# Altium PCB Altium_XIAO-BOT-Control-Board.pcbdoc
Units mil, origin at the board's own origin, x right, y up, seen from the top; angles counter-clockwise.
Board outline 2024.18 x 3035.1 mil, 2 copper layers (Top Layer, Bottom Layer); 11 components, 31 nets, 74 pads, 1 vias.
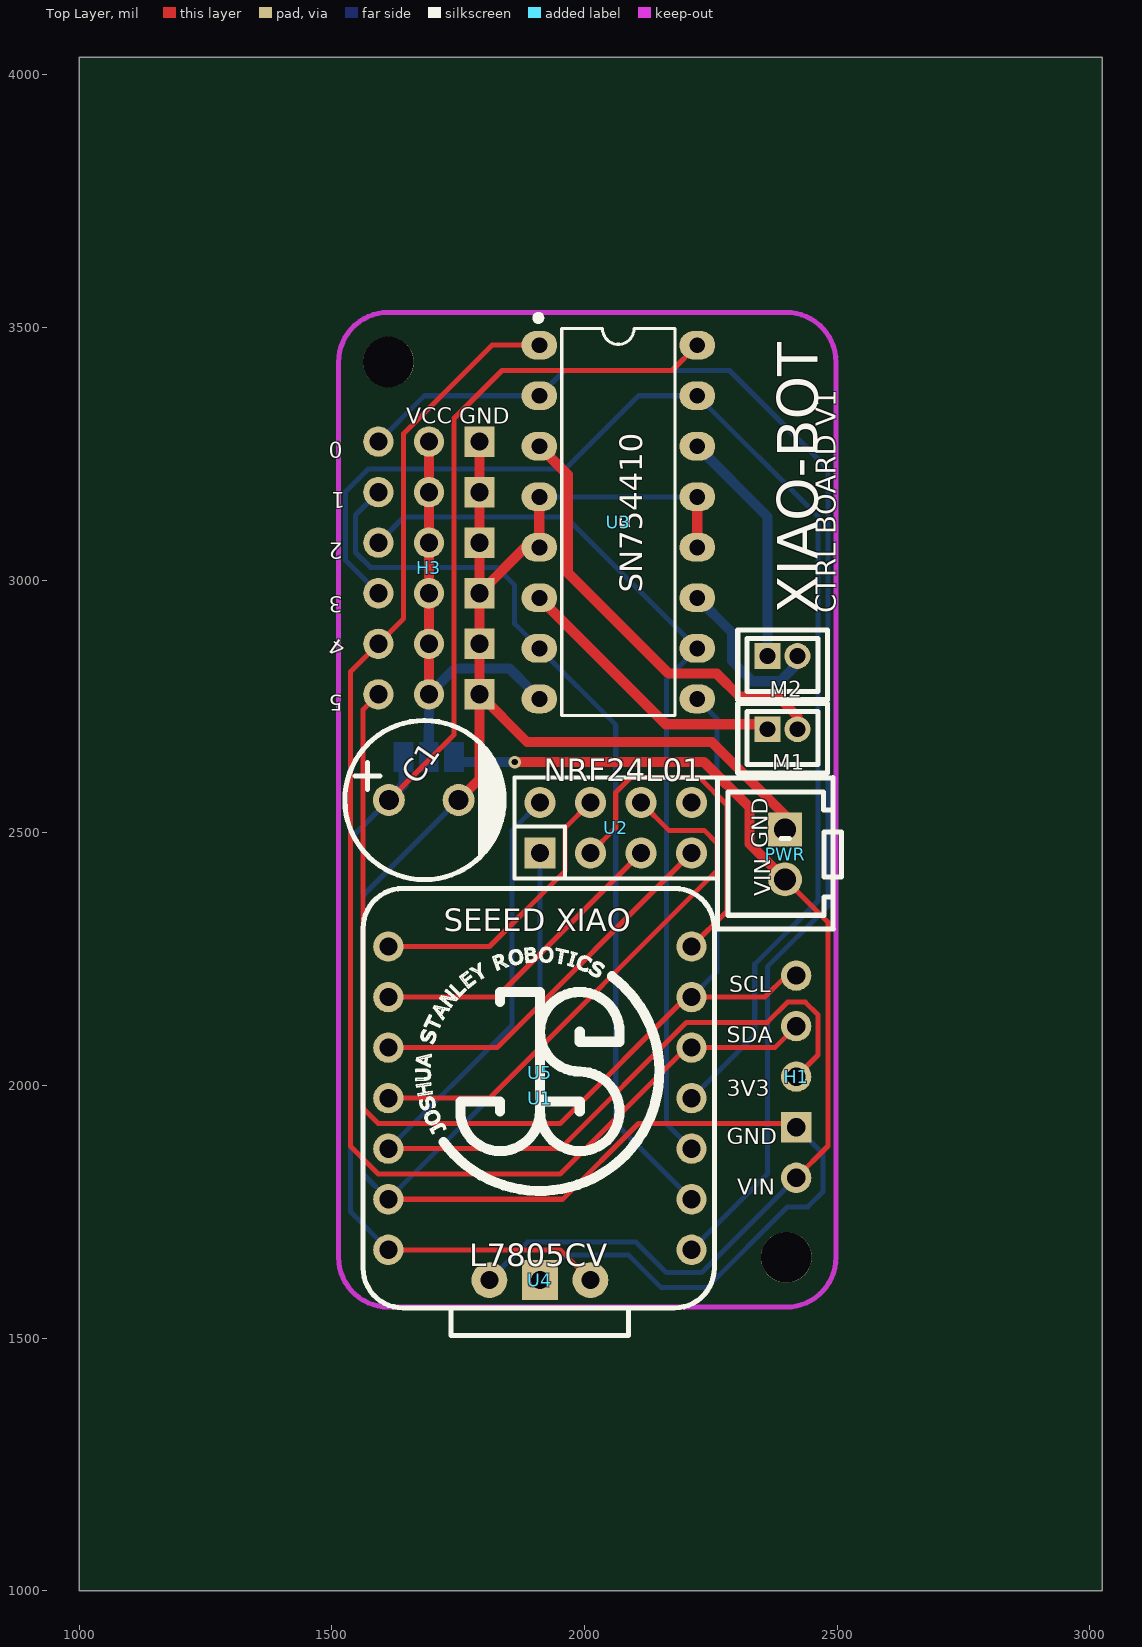
[diagram p0: Top Layer view]
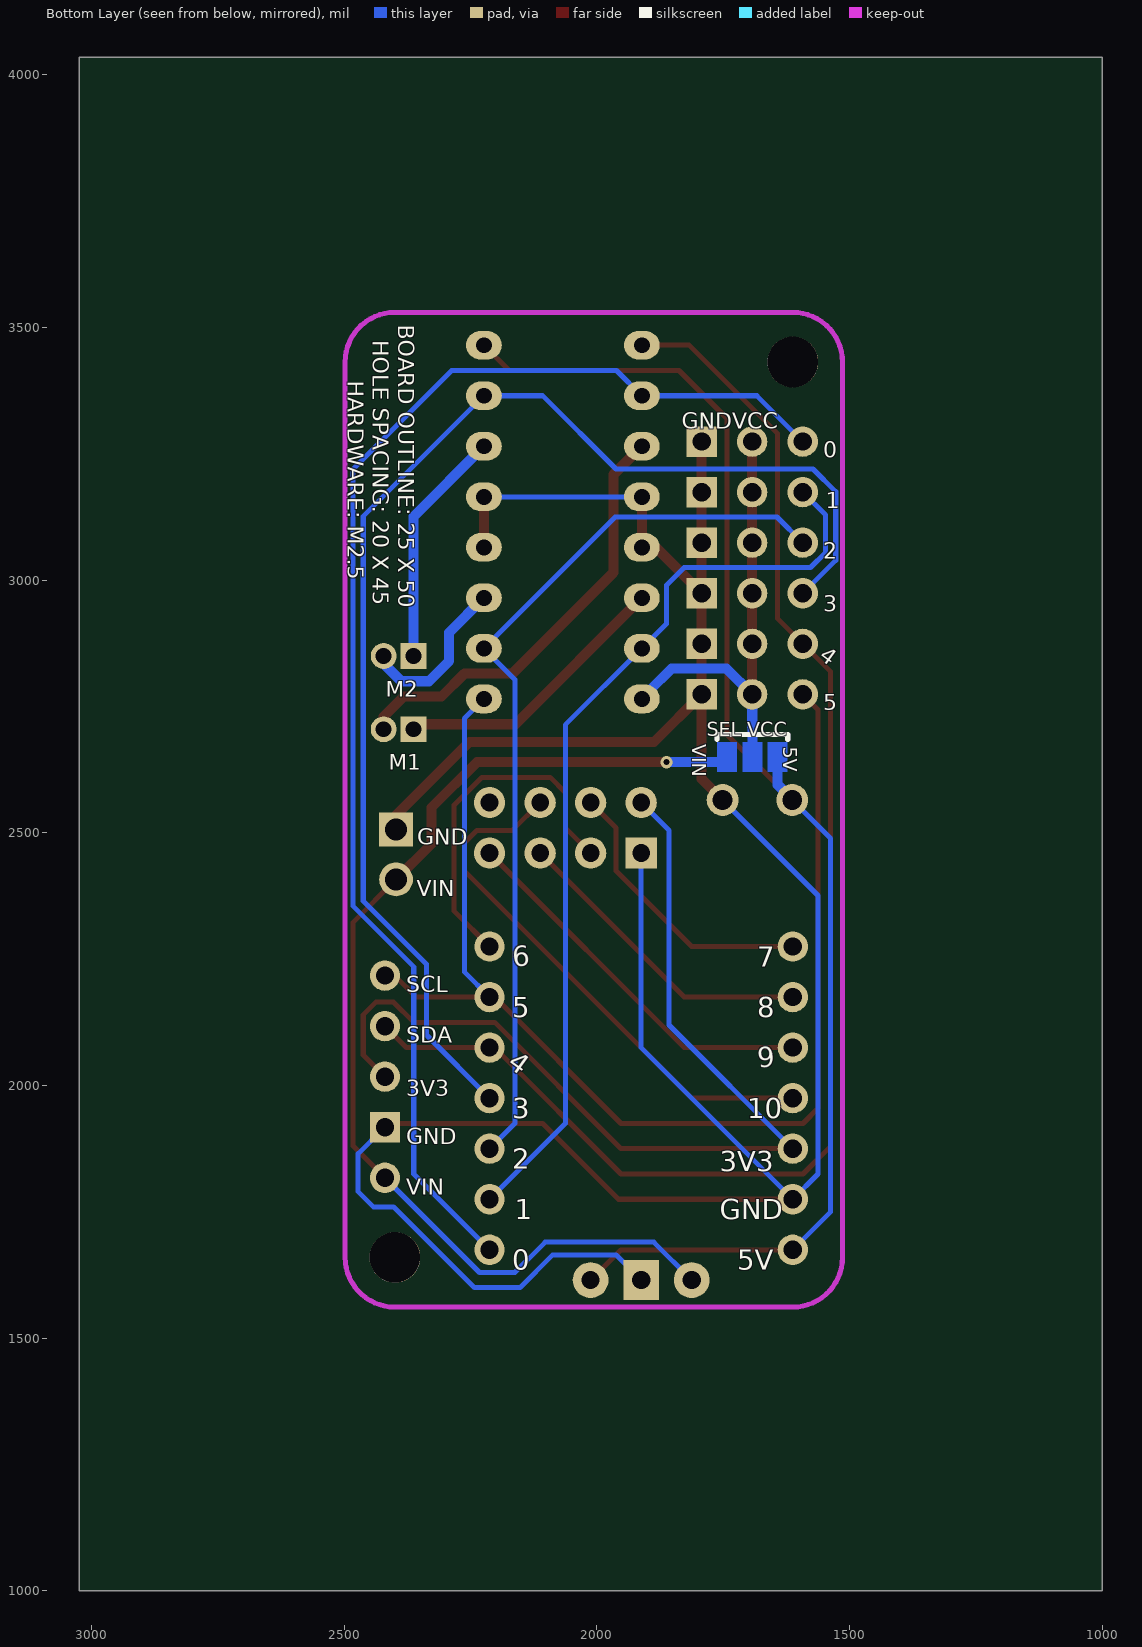
[diagram p1: Bottom Layer view, seen from below]

## Layer stack, top to bottom
Top Layer: signal copper (thickness not stored)
Dielectric: dielectric 12.6, FR-4, Dk 4.8
Bottom Layer: signal copper (thickness not stored)

## Board outline
3024.18,1000 1000,1000 1000,4035.1 3024.18,4035.1

## Components (designator, comment, footprint, x,y, rotation, side; value= is the part's Value field where it differs from the comment)
C1 "1000uF" CAP-TH_BD8.0-P3.50-D0.6-FD-2 1681.93,2565 r0 top
H1 "HDR_2.54_1x5" HDR_2.54_1X5 2419.02,1817.48 r180 top
H3 "D0-5" HDR_2.54_3X6 1592.25,3274.17 r0 top
M1 "1.5 JST" CONN-TH_2P-P1.50_JST_B2B-ZR-K 2391.93,2705 r180 top
M2 "1.5 JST" CONN-TH_2P-P1.50_JST_B2B-ZR-K 2391.93,2850 r180 top
PWR "XHB-2A Connector" CONN-TH_XHB-2A 2396.98,2457.2 r90 top
U1 "SEEED XIAO" "SEEED XIAO" 2211.93,1675 r180 top
U2 "NRF24L01" HDR-F-2.54_2X4 2061.93,2510 r0 top
U3 "SN754410" PDIP-16_L19.3-W6.4-P2.54-LS7.94-BL 2066.93,3115 r270 top
U4 "L7805CV" L7805 1911.93,1615 r0 top
U5 "Logo" LOGO 1911.93,2025 r0 top

## Footprints (in the part's own frame and the unit in brackets; to place one, negate y for a bottom-side part, rotate by r counter-clockwise, add the part's x,y. Pads: shape width x height; smd on the part's side, far side on the other; paste and mask are expansions set on the pad)
CAP-TH_BD8.0-P3.50-D0.6-FD-2 [mm]
  round 1.6 hole 1 paste+0 mask+0.051: 1(-1.75,0) 2(1.75,0)
  silkscreen extent -3.96,-4 4.04,4
CONN-TH_2P-P1.50_JST_B2B-ZR-K [mm]
  rect 1.3x1.3 hole 0.8 paste+0 mask+0.05: 1(0.75,0)
  round 1.3 hole 0.8 paste+0 mask+0.05: 2(-0.75,0)
  silkscreen extent -2.25,-1.3 2.25,2.2
CONN-TH_XHB-2A [mm]
  rect 1.7x1.7 hole 1.1 paste+0 mask+0.051: 1(1.251,0)
  round 1.7 hole 1.1 paste+0 mask+0.051: 2(-1.251,0)
  silkscreen extent -3.75,-2.84 3.86,3.4
HDR-F-2.54_2X4 [mil]
  rect 62x62 hole 35 paste+0 mask+2: 1(-150,-50)
  round 62 hole 35 paste+0 mask+2: 2(-150,50) 3(-50,-50) 4(-50,50) 5(50,-50) 6(50,50) 7(150,-50) 8(150,50)
  silkscreen extent -200,-100 200,100
HDR_2.54_1X5 [mil]
  round 60 hole 36 paste+0 mask+2: 1(0,0) 3(0,-200) 4(0,-300) 5(0,-400)
  rect 60x60 hole 36 paste+0 mask+2: 2(0,-100)
HDR_2.54_3X6 [mil]
  round 60 hole 36 paste+0 mask+2: 1(0,0) 2(0,-100) 3(0,-200) 4(0,-300) 5(0,-400) 6(0,-500) 7(100,-500) 8(100,-400) 9(100,-300) 10(100,-200) 11(100,-100) 12(100,0)
  rect 60x60 hole 36 paste+0 mask+2: 13(200,0) 14(200,-100) 15(200,-200) 16(200,-300) 17(200,-400) 18(200,-500)
L7805 [mm]
  round 1.8 hole 0.914 paste+0 mask+0.051: 1(-2.54,0) 3(2.54,0)
  rect 1.8x2 hole 0.914 paste+0 mask+0.051: 2(0,0)
LOGO [mil]
  silkscreen extent -245,-233 236,248
PDIP-16_L19.3-W6.4-P2.54-LS7.94-BL [mm]
  oval 1.44x1.8 hole 0.8 paste+0 mask+0.051: 1(-8.89,-3.97) 2(-6.35,-3.97) 3(-3.81,-3.97) 4(-1.27,-3.97) 5(1.27,-3.97) 6(3.81,-3.97) 7(6.35,-3.97) 8(8.89,-3.97) 9(8.89,3.97) 10(6.35,3.97) 11(3.81,3.97) 12(1.27,3.97) 13(-1.27,3.97) 14(-3.81,3.97) 15(-6.35,3.97) 16(-8.89,3.97)
  silkscreen extent -10.41,-4.17 9.73,2.84
"SEEED XIAO" [mil]
  round 60 hole 36 paste+0 mask+2: 0(0,0) 1(0,-100) 2(0,-200) 3(0,-300) 4(0,-400) 5(0,-500) 6(0,-600) 7(600,-600) 8(600,-500) 9(600,-400) 10(600,-300) 11(600,-200) 12(600,-100) 13(600,0)
  silkscreen extent -45,-715 650,170

## Free pads (board coordinates)
  round 100.39 hole 100.39 unplated paste+0: ""(1611.93,3431.65) ""(2399.33,1660)

## Via types
v1: diameter 24.41, hole 12.2, Top Layer to Bottom Layer, tented both sides, 1 vias

## Nets (pads, with @x,y where several pads share a name; then routed paths per layer and width w, separated by ;. In a path a pad name is that pad's centre, name@x,y a point inside that pad or via, vN(x,y) a via of type N, cw(c..) or ccw(c..) an arc to the next point about the centre after c; other vN are vias at no path point)
3V3: H1.3 U1.11 U2.2 | length 1930
  Top Layer w10: U1.11 1951.93,1875 2201.93,2125 2361.93,2125 2401.93,2165 2436.93,2165 2461.93,2140 2461.93,2060.4 H1.3
  Bottom Layer w10: U1.11 1856.93,2120 1856.93,2505 U2.2
+5V: C1.1 U1.13 U3.16 U4.3 | length 2824.2
  Top Layer w10: U1.13 1951.93,1675 U4.3 ; C1.1 1741.93,2693.9 1741.93,3320 1836.93,3415 2173.23,3415 U3.16
  Bottom Layer w10: U1.13 1536.93,1750 1536.93,2488.9 C1.1
  Bottom Layer w20: C1.1 1613.03,2566.1 1641.93,2595 1641.93,2650
CE: U1.6 U2.3 | length 704.9
  Top Layer w10: U2.3 2061.93,2510 2061.93,2580 2091.93,2610 2226.93,2610 2281.93,2555 2281.93,2345 U1.6
CSN: U1.7 U2.4 | length 567.8
  Top Layer w10: U1.7 1811.93,2275 1961.93,2425 1961.93,2510 U2.4
D0: H3.1 U1.0 U3.2 | length 2685.6
  Bottom Layer w10: H3.1 1683.08,3365 U3.2 1960.63,3415 2286.93,3415 2481.93,3220 2481.93,2355 2361.93,2235 2361.93,1825 U1.0
D1: H3.2 U1.1 U3.7 | length 1839.9
  Bottom Layer w10: H3.2@1592.23,3174.2 1546.93,3128.9 1546.93,3055 1576.93,3025 1826.93,3025 1861.93,2990 1861.93,2913.7 U3.7 2061.93,2713.7 2061.93,1925 U1.1
D2: H3.3 U1.2 U3.10 | length 1795.8
  Bottom Layer w10: H3.3@1592.23,3074.2 1643.03,3125 1963.23,3125 U3.10 2161.93,2803.7 2161.93,1925 U1.2
D3: H3.4 U1.3 U3.15 | length 2595.3
  Bottom Layer w10: H3.4@1592.23,2974.2 1526.93,3039.5 1526.93,3175 1571.93,3220 1961.93,3220 2106.93,3365 U3.15 2461.93,3126.3 2461.93,2365 2336.93,2240 2336.93,2100 U1.3
D4: H1.4 H3.5 U1.4 U3.1 | length 2820.7
  Top Layer w10: U3.1 1816.93,3465 1641.93,3290 1641.93,2923.9 1592.23,2874.2 1536.93,2818.9 1536.93,1880 1591.93,1825 1951.93,1825 2201.93,2075 U1.4 2376.53,2075 H1.4
D5: H1.5 H3.6 U1.5 U3.9 | length 2468.9
  Top Layer w10: H3.6@1592.23,2774.2 1561.93,2743.9 1561.93,1955 1591.93,1925 1951.93,1925 2201.93,2175 U1.5 2356.93,2175 2399.43,2217.5 H1.5@2438.73,2217.5
  Bottom Layer w10: U1.5 2261.93,2225 2261.93,2726.3 U3.9
GND: C1.2 H1.2 H3.13 H3.14 H3.15 H3.16 H3.17 H3.18 PWR.1 U1.12 U2.1 U3.4 U3.5 U3.12 U3.13 U4.2 | length 5534.2
  Top Layer w10: U1.12 1956.93,1775 2106.93,1925 2419.03,1925 H1.2
  Top Layer w20: C1.2 1792.23,2606.4 1792.23,2774.2 1886.43,2680 2251.93,2680 2396.93,2535 PWR.1@2396.93,2506.5 ; H3.18 H3.17 H3.16 ; H3.13 H3.14 H3.15 H3.16 ; U3.4 U3.5 1883.08,3065 H3.16 ; U3.12 U3.13
  Bottom Layer w10: C1.2 1561.93,2376.1 1561.93,1825 U1.12 1911.93,2075 U2.1 ; U3.4 U3.13 ; U4.2 1961.93,1665 2086.93,1665 2151.93,1600 2241.93,1600 2401.93,1760 2441.93,1760 2471.93,1790 2471.93,1865 H1.2@2421.93,1915
MISO: U1.9 U2.7 | length 759.5
  Top Layer w10: U1.9 1826.93,2075 U2.7
MOSI: U1.10 U2.6 | length 1074.5
  Top Layer w10: U1.10 1811.93,1975 2261.93,2425 2261.93,2480 2236.93,2505 2166.93,2505 U2.6
S$2410: 
S$2414: 
S$2418: 
S$2422: 
S$4090: 
S$4094: 
S$4098: 
S$4102: 
S$6297: 
S$14702: 
SCK: U1.8 U2.5 | length 618.1
  Top Layer w10: U1.8 1826.93,2175 U2.5
U2_8: U2.8
U3_3: M1.2 U3.3 | length 871.2
  Top Layer w20: U3.3 1966.93,3208.7 1966.93,3015 2166.93,2815 2261.93,2815 2306.93,2770 2381.93,2770 2421.45,2730.48 M1.2
U3_6: M1.1 U3.6 | length 565.3
  Top Layer w20: U3.6 2160.63,2715 2362.4,2715 M1.1
U3_11: M2.2 U3.11 | length 329.3
  Bottom Layer w20: U3.11 2291.93,2896.3 2291.93,2840 2331.93,2800 2386.93,2800 2421.45,2834.53 M2.2
U3_14: M2.1 U3.14 | length 472.6
  Bottom Layer w20: U3.14 2362.4,3125.83 M2.1
VCC: H3.7 H3.8 H3.9 H3.10 H3.11 H3.12 U3.8 | length 877.7
  Top Layer w20: H3.7 H3.8 H3.9 H3.10 H3.11 H3.12
  Bottom Layer w20: 1691.93,2640 1692.23,2774.2 1743.03,2825 1851.93,2825 U3.8@1896.33,2780.6
VIN: H1.1 PWR.2 U4.1 | length 2188.8
  Top Layer w10: PWR.2 2481.93,2323 2481.93,1880.39 H1.1
  Top Layer w20: v1(1861.93,2640) 2236.93,2640 2326.93,2550 2326.93,2478 PWR.2@2396.98,2407.95
  Bottom Layer w10: U4.1 1886.93,1690 2101.93,1690 2161.93,1630 2231.93,1630 H1.1@2416.93,1815
  Bottom Layer w20: 1741.93,2655 1756.93,2640 v1(1861.93,2640)

## Keep-outs
Keep-Out Layer:
  lines w10 net S$2410: 1513.51,1660 ccw(c1611.93,1660) 1611.93,1561.58
  lines w10 net S$2414: 2399.33,1561.58 ccw(c2399.33,1660) 2497.76,1660
  lines w10 net S$2418: 2399.33,3530.08 cw(c2399.33,3431.65) 2497.76,3431.65
  lines w10 net S$2422: 1513.51,3431.65 cw(c1611.93,3431.65) 1611.93,3530.08

## Other copper
Bottom Layer:
  rectangle net +5V: 1622.25,2620.47 1661.62,2679.53
  rectangle net VCC: 1672.25,2620.47 1711.62,2679.53
  rectangle net VIN: 1722.25,2620.47 1761.62,2679.53

## Silkscreen, mask and mechanical layers (free items; w line width, h text height)
Top Overlay:
  lines w7.87 net S$6297: 1861.93,2512.59 1961.93,2512.59 1961.93,2410
  text "CTRL BOARD V1" at 2496.93,2935 h40 r90
  text "XIAO-BOT" at 2461.29,2933.31 h80 r90
  text "GND" at 2362.68,2470 h31.5 r90
  text "VIN" at 2367.68,2375 h31.5 r90
  text "SCL" at 2286.93,2184.25 h31.5
  text "SDA" at 2281.93,2084.25 h31.5
  text "3V3" at 2281.93,1979.25 h31.5
  text "GND" at 2281.93,1884.25 h31.5
  text "VIN" at 2301.93,1784.25 h31.5
Bottom Overlay:
  lines w10 net S$14702: 1621.93,2685 1621.93,2695 1761.93,2695 1761.93,2685
  text "BOARD OUTLINE: 25 X 50" at 2392.68,3505 h31.5 r90
  text "HOLE SPACING: 20 X 45" at 2442.68,3475 h31.5 r90
  text "HARDWARE: M2.5" at 2492.68,3395 h31.5 r90
  text "VCC" at 1731.93,3299.25 h31.5
  text "GND" at 1831.93,3299.25 h31.5
  text "0" at 1551.93,3242.22 h31.5
  text "1" at 1546.93,3142.22 h31.5
  text "2" at 1551.93,3042.22 h31.5
  text "3" at 1551.93,2937.22 h31.5
  text "4" at 1561.19,2845.23 h31.5 r36
  text "M2" at 2416.93,2769.51 h30.98
  text "5" at 1551.93,2742.22 h31.5
  text "SEL VCC" at 1781.93,2691.22 h27.56
  text "VIN" at 1810.71,2675 h27.56 r90
  text "5V" at 1630.71,2670 h27.56 r90
  text "M1" at 2411.93,2624.51 h30.98
  text "GND" at 2354.74,2476.18 h31.5
  text "VIN" at 2356.04,2374.68 h31.5
  text "SCL" at 2376.93,2184.25 h31.5
  text "SDA" at 2376.93,2084.25 h31.5
  text "3V3" at 2376.93,1979.25 h31.5
  text "GND" at 2376.93,1884.25 h31.5
  text "VIN" at 2376.93,1784.25 h31.5
Bottom Solder:
  rectangle net VIN: 1720.25,2618.47 1763.62,2681.53
  rectangle net VCC: 1670.25,2618.47 1713.62,2681.53
  rectangle net +5V: 1620.25,2618.47 1663.62,2681.53

## Text inside footprints (layer, text, board x,y; h text height)
H3: Top Overlay "0" at 1521.93,3273.72 h31.5 r180; Top Overlay "1" at 1526.93,3173.72 h31.5 r180; Top Overlay "3" at 1521.93,2968.72 h31.5 r180; Top Overlay "4" at 1530.97,2870.87 h31.5 r145; Top Overlay "5" at 1521.93,2773.72 h31.5 r180; Top Overlay "2" at 1521.93,3073.72 h31.5 r180; Top Overlay "VCC" at 1646.93,3309.25 h31.5; Top Overlay "GND" at 1751.93,3309.25 h31.5
U1: Bottom Overlay "0" at 2166.93,1635.32 h39.37; Bottom Overlay "1" at 2161.93,1735.32 h39.37; Bottom Overlay "2" at 2166.93,1835.32 h39.37; Bottom Overlay "3" at 2166.93,1935.32 h39.37; Bottom Overlay "4" at 2178.5,2039.07 h39.37 r36; Bottom Overlay "5" at 2166.93,2135.32 h39.37; Bottom Overlay "6" at 2165.22,2235.39 h39.37 r355; Bottom Overlay "7" at 1681.93,2235.32 h39.37; Bottom Overlay "8" at 1681.93,2135.32 h39.37; Bottom Overlay "9" at 1680.22,2035.39 h39.37 r355; Bottom Overlay "10" at 1701.93,1935.32 h39.37; Bottom Overlay "3V3" at 1756.93,1830.32 h39.37; Bottom Overlay "GND" at 1756.93,1735.32 h39.37; Bottom Overlay "5V" at 1721.93,1635.32 h39.37